# Altium PCB Inverter45attempt.PcbDoc (part 1 of 3)
Units mm, origin at the board's own origin, x right, y up, seen from the top; angles counter-clockwise.
Board outline 150 x 150 mm, 2 copper layers (Top Layer, Bottom Layer), stack 1.74 mm thick; 275 components, 191 nets, 1690 pads, 661 vias.
Unrouted connection lines stored in the file: 411.
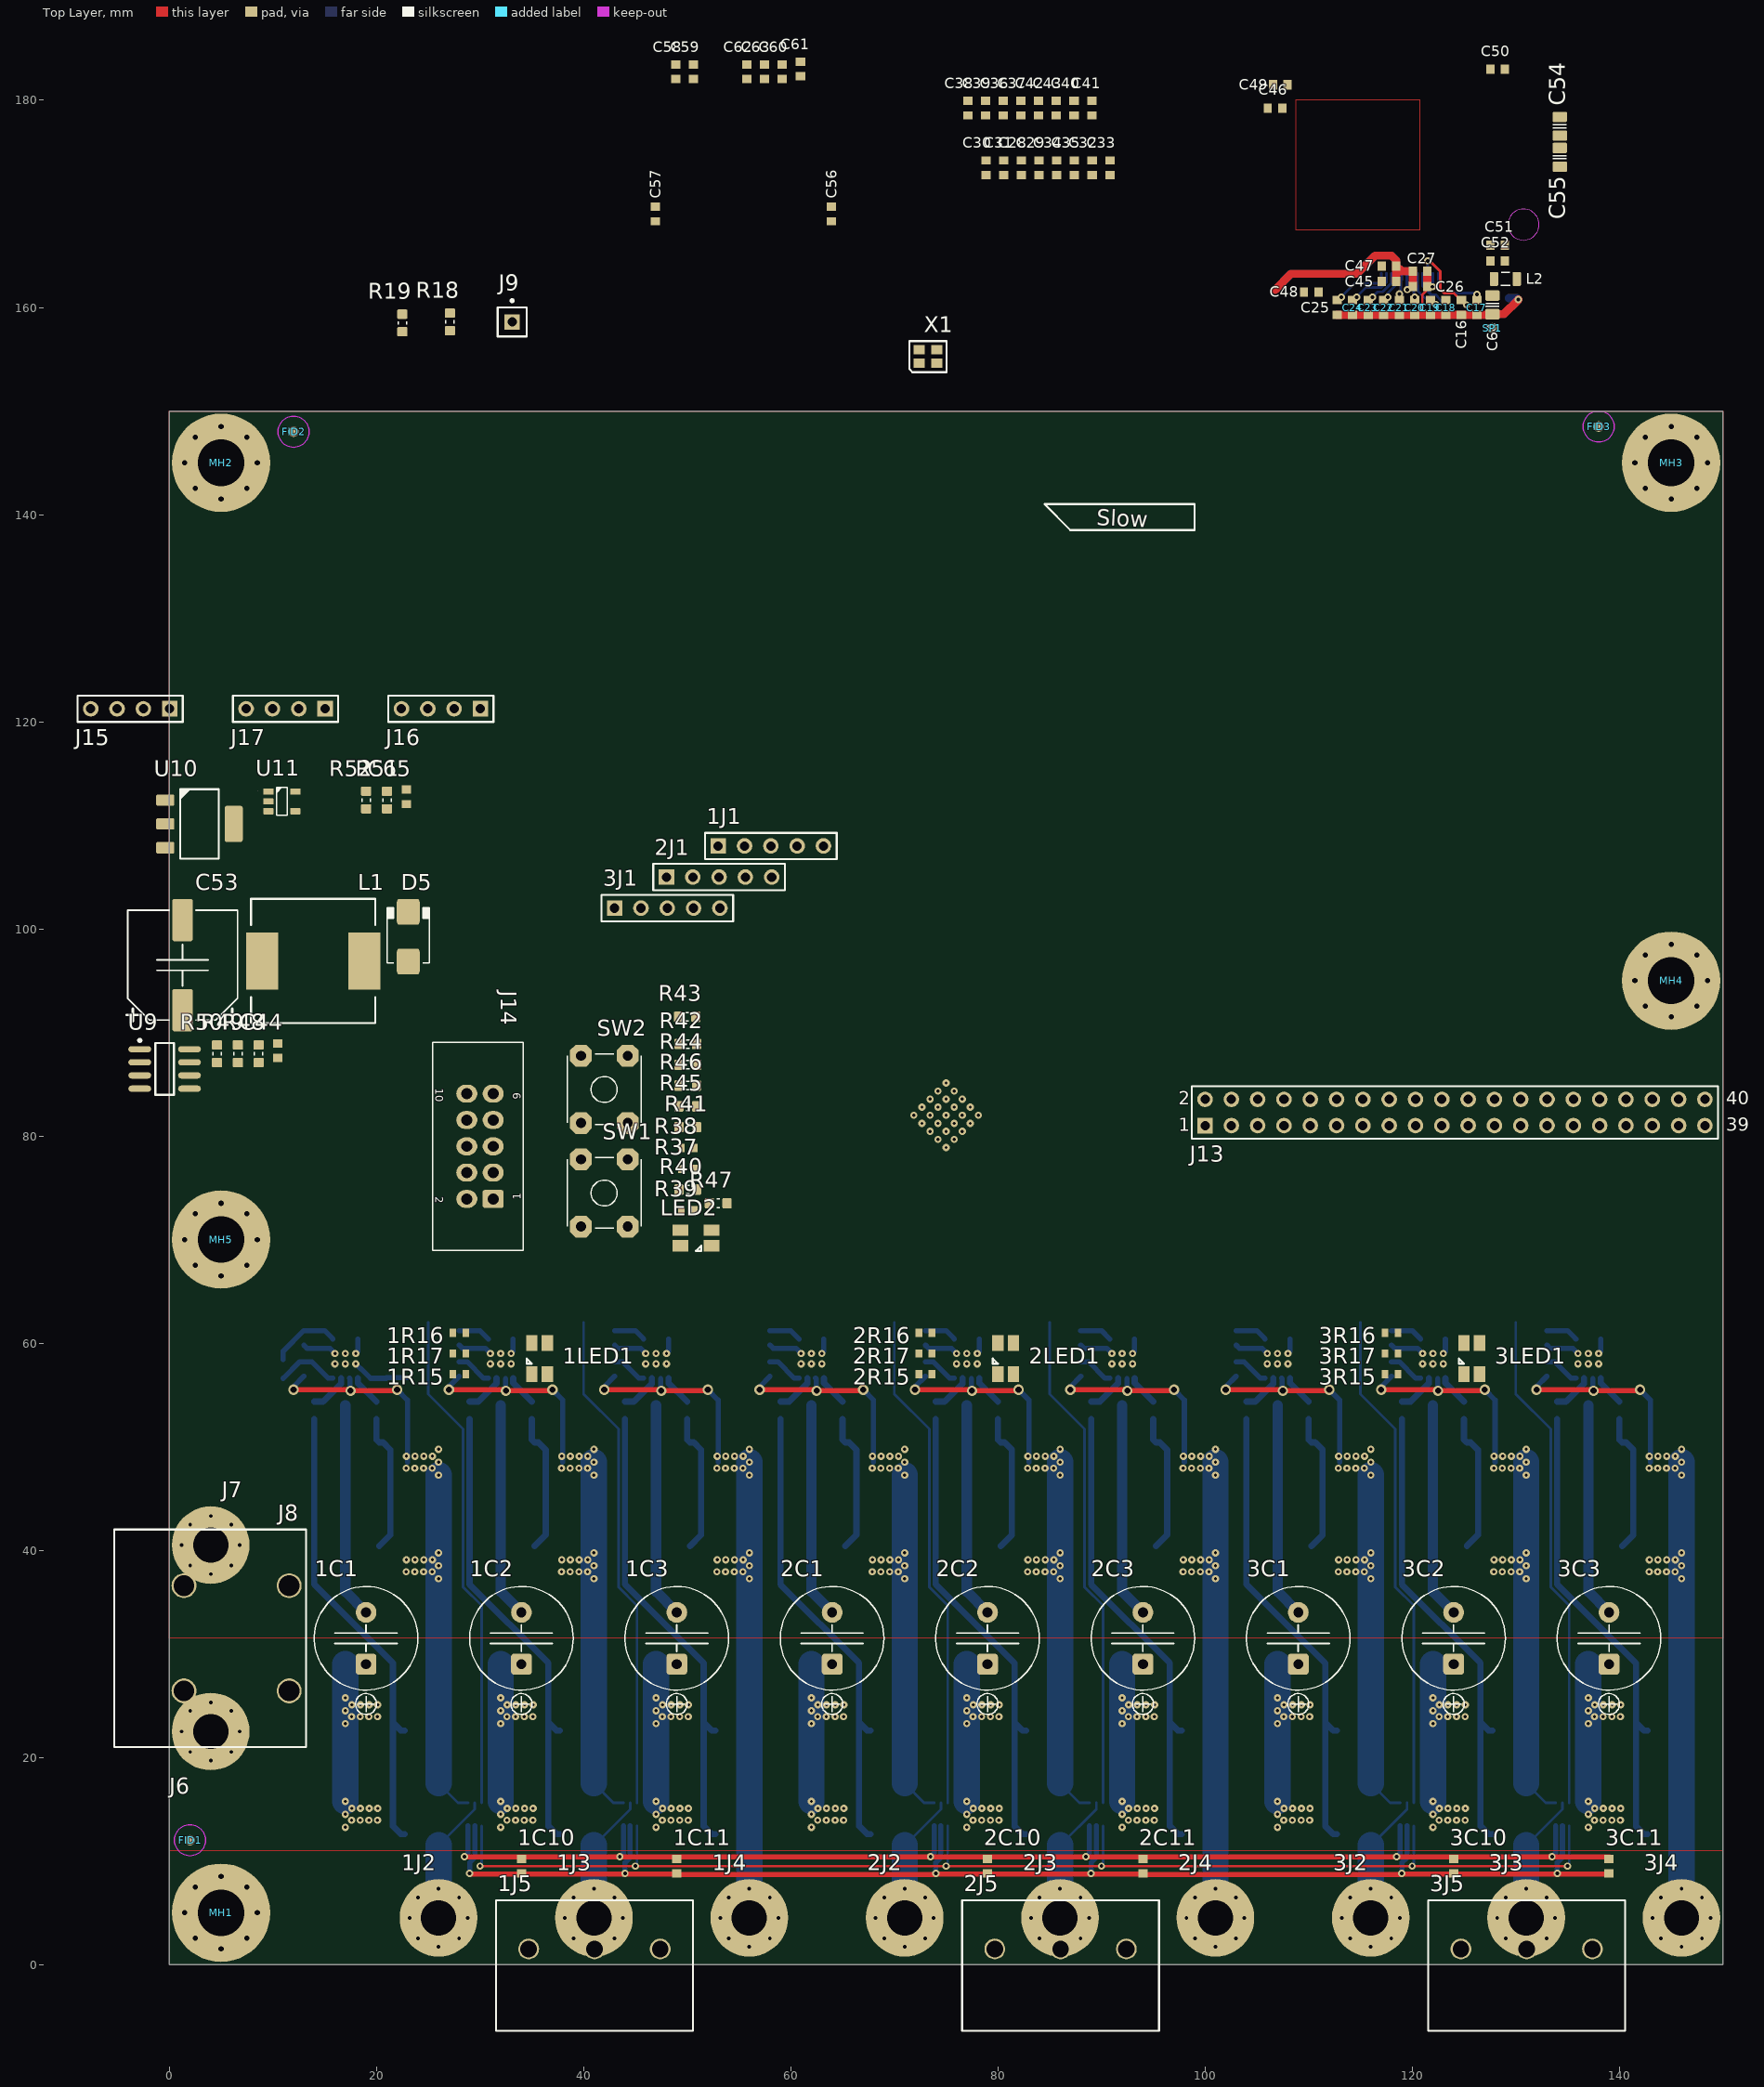
[diagram p0: Top Layer view]
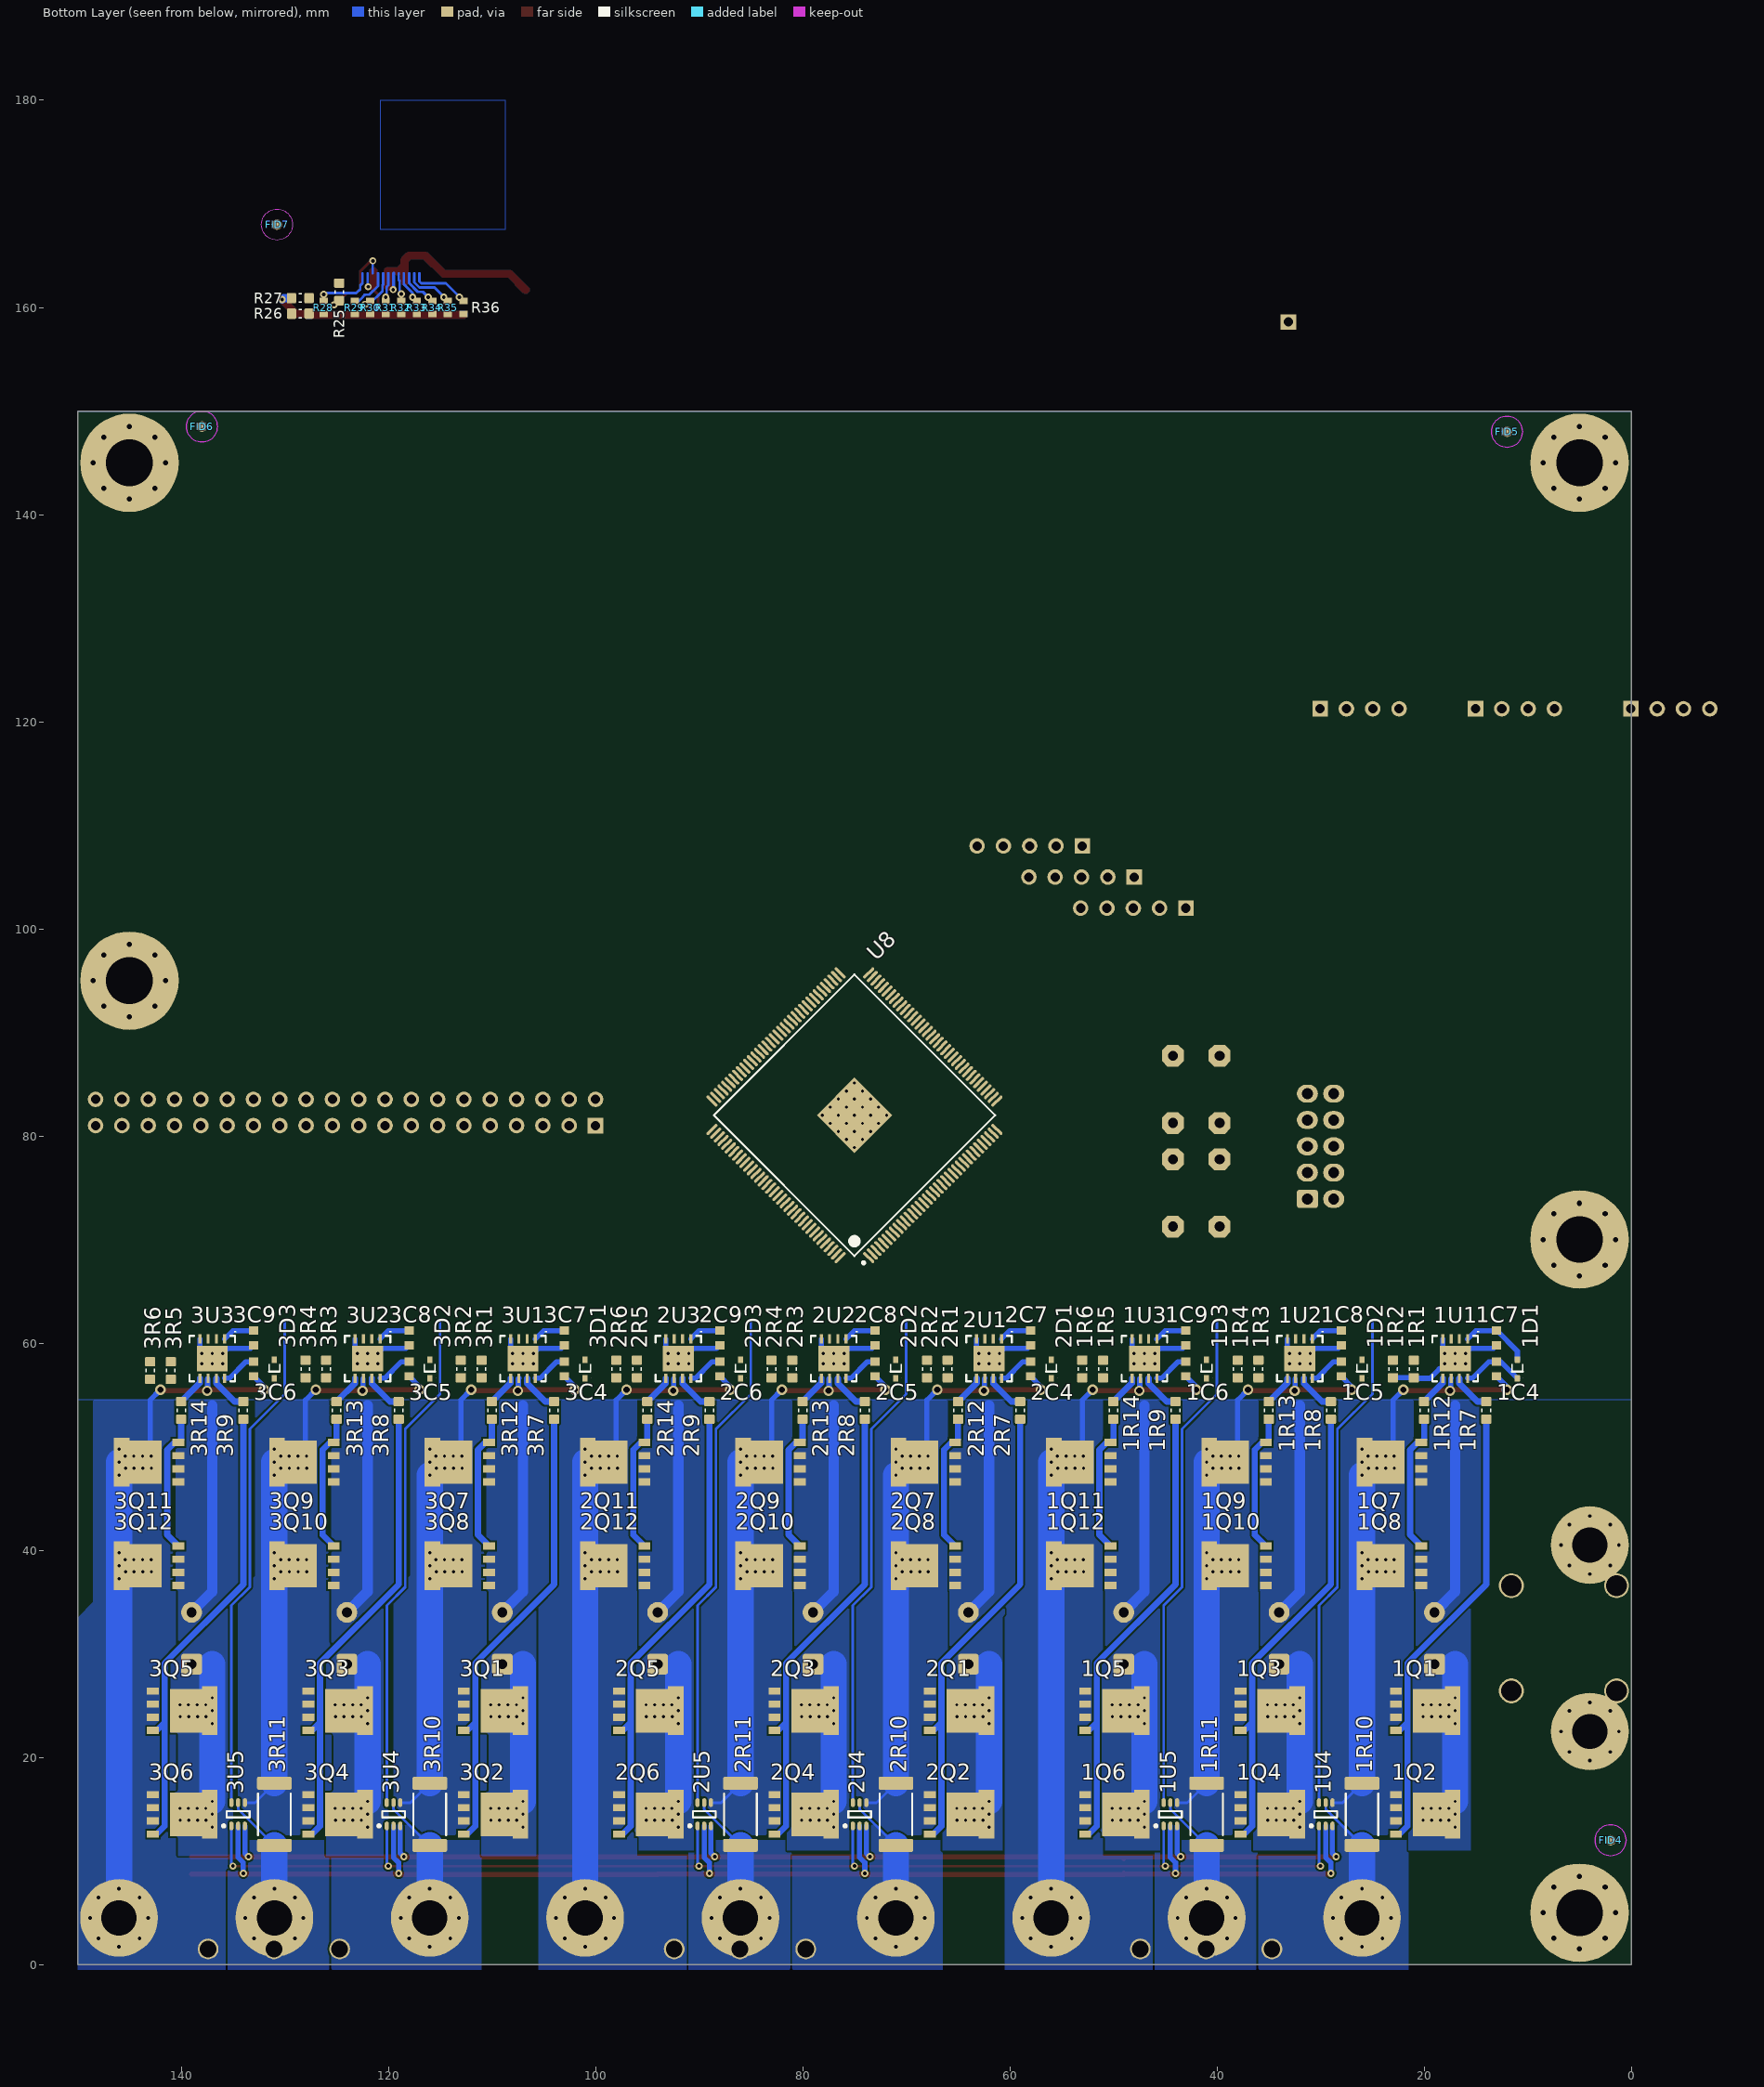
[diagram p1: Bottom Layer view, seen from below]

## Layer stack, top to bottom
Top Solder: solder mask 0.0102, Solder Resist, Dk 3.5
Top Layer: signal copper 0.07
Dielectric 1: dielectric 1.6, FR-4, Dk 4.8
Bottom Layer: signal copper 0.07
Bottom Solder: solder mask 0.0102, Solder Resist, Dk 3.5

## Board outline
0,0 150,0 150,150 0,150

## Design rules (kind name [scope] priority, off if disabled: settings)
AssemblyTestPointUsage SilkToBoardRegionClearance [All] p2:
Clearance HV_Clearance [InNetClass('HV')] p1: gap=0.2
Clearance [All] p2: gap=0.152
ComponentClearance ScrewTerminals [HasFootprint('MC000051') Or HasFootprint('MC000232') vs (HasFootprint('M3 Spade Hole'))] p1: gap=-10 collisioncheckmode=3 verticalgap=2540 showdistances=FALSE
ComponentClearance [All] p2: gap=0.254 collisioncheckmode=3 verticalgap=0.254 showdistances=FALSE
Height [All] p1: minheight=0 maxheight=30 prefheight=12.7
MatchedLengths DiffPair_DIFF100MatchedLengths [InDifferentialPairClass('DIFF100')] p1: tolerance=0.152 checknetsindiffpair=TRUE checkdiffpairvsdiffpair=FALSE checkothers=FALSE
MinimumSolderMaskSliver SilkscreenOverComponentPads_1 [All] p2: minsoldermaskwidth=0.254
MinimumSolderMaskSliver SilkToSolderMaskClearance [IsPad] p3: minsoldermaskwidth=0.254
MinimumSolderMaskSliver SilkscreenOverComponentPads [All] p4: minsoldermaskwidth=0.254
PolygonConnect [All] p1: connectstyle=Direct reliefconductorwidth=0.254 reliefentries=4 polygonreliefangle="90 Angle" airgapwidth=0.254
RoutingVias [All] p1: holewidth=0.35 width=0.7 viastyle="Through Hole" minholewidth=0.3 minwidth=0.6 maxholewidth=1 maxwidth=1.4
SilkToBoardRegionClearance SilkToBoardRegionClearance_1 [All] p1:
SilkToSolderMaskClearance SilkToSolderMaskClearance_1 [IsPad] p1: minsilkscreentomaskgap=0.254 clearancetoexposedcopper=TRUE
SolderMaskExpansion [All] p1: expansion=0.102
UnpouredPolygon [All] p1: allowunpoured=FALSE
Width PWR [InNetClass('PWR')] p1: maxlimit=10 minlimit=0.254 preferedwidth=0.5 minimp=50.000000 maximp=50.000000 favimp=50.000000
Width [All] p2: maxlimit=2.54 minlimit=0.152 preferedwidth=0.254
25 further rules are at their usual default settings.

## Classes and differential pairs
component class M2: 2C1 2C2 2C3 2C4 2C5 2C6 2C7 2C8 2C9 2C10 2C11 2D1 2D2 2D3 2J1 2J2 2J3 2J4 2J5 2LED1 2Q1 2Q2 2Q3 2Q4 2Q5 2Q6 2Q7 2Q8 2Q9 2Q10 2Q11 2Q12 2R1 2R2 2R3 2R4 2R5 2R6 2R7 2R8 2R9 2R10 2R11 2R12 2R13 2R14 2R15 2R16 2R17 2U1 2U2 2U3 2U4 2U5
component class M1: 1C1 1C2 1C3 1C4 1C5 1C6 1C7 1C8 1C9 1C10 1C11 1D1 1D2 1D3 1J1 1J2 1J3 1J4 1J5 1LED1 1Q1 1Q2 1Q3 1Q4 1Q5 1Q6 1Q7 1Q8 1Q9 1Q10 1Q11 1Q12 1R1 1R2 1R3 1R4 1R5 1R6 1R7 1R8 1R9 1R10 1R11 1R12 1R13 1R14 1R15 1R16 1R17 1U1 1U2 1U3 1U4 1U5
net class HV: 1PH_A 1PH_A_Q 1PH_B 1PH_B_Q 1PH_C 2PH_A 2PH_A_Q 2PH_B 2PH_B_Q 2PH_C 3PH_A 3PH_A_Q 3PH_B 3PH_B_Q 3PH_C DCBUS Net1C4_2 Net1C5_2 Net1C6_2 Net1Q1_G Net1Q3_G Net1Q5_G Net1Q7_G Net1Q9_G Net1Q11_G Net1R7_2 Net1R8_2 Net1R9_2 Net1R12_2 Net1R13_2 Net1R14_2 Net2C4_2 Net2C5_2 Net2C6_2 Net2Q1_G Net2Q3_G Net2Q5_G Net2Q7_G Net2Q9_G Net2Q11_G Net2R7_2 Net2R8_2 Net2R9_2 Net2R12_2 Net2R13_2 Net2R14_2 Net3C4_2 Net3C5_2 Net3C6_2 Net3Q1_G Net3Q3_G Net3Q5_G Net3Q7_G Net3Q9_G Net3Q11_G Net3R7_2 Net3R8_2 Net3R9_2 Net3R12_2 Net3R13_2 Net3R14_2
component class M3: 3C1 3C2 3C3 3C4 3C5 3C6 3C7 3C8 3C9 3C10 3C11 3D1 3D2 3D3 3J1 3J2 3J3 3J4 3J5 3LED1 3Q1 3Q2 3Q3 3Q4 3Q5 3Q6 3Q7 3Q8 3Q9 3Q10 3Q11 3Q12 3R1 3R2 3R3 3R4 3R5 3R6 3R7 3R8 3R9 3R10 3R11 3R12 3R13 3R14 3R15 3R16 3R17 3U1 3U2 3U3 3U4 3U5
net class ENC_A[1..3]: ENC_A1 ENC_A2 ENC_A3
net class ENC_B[1..3]: ENC_B1 ENC_B2 ENC_B3
net class ENC_Z[1..3]: ENC_Z1 ENC_Z2 ENC_Z3
net class IA[1..3]: IA1 IA2 IA3
net class IB[1..3]: IB1 IB2 IB3
net class LEDB[1..3]: LEDB1 LEDB2 LEDB3
net class LEDG[1..3]: LEDG1 LEDG2 LEDG3
net class LEDR[1..3]: LEDR1 LEDR2 LEDR3
net class PWM_AH[1..3]: PWM_AH1 PWM_AH2 PWM_AH3
net class PWM_AL[1..3]: PWM_AL1 PWM_AL2 PWM_AL3
net class PWM_BH[1..3]: PWM_BH1 PWM_BH2 PWM_BH3
net class PWM_BL[1..3]: PWM_BL1 PWM_BL2 PWM_BL3
net class PWM_CH[1..3]: PWM_CH1 PWM_CH2 PWM_CH3
net class PWM_CL[1..3]: PWM_CL1 PWM_CL2 PWM_CL3
channel class M0: M1 M2 M3
component class Analouge: C16 C17 C18 C19 C20 C21 C22 C23 C24 C25 R25 R26 R27 R28 R29 R30 R31 R32 R33 R34 R35 R36
component class AUX: J6 J7 J8 J9 R18 R19
component class Config: J14 LED2 R37 R38 R39 R40 R41 R42 R43 R44 R45 R46 R47 SW1 SW2
component class FPGA: FID7 J13 X1
component class Power: C26 C27 C28 C29 C30 C31 C32 C33 C34 C35 C36 C37 C38 C39 C40 C41 C42 C43 C44 C45 C46 C47 C48 C49 C50 C51 C52 C53 C54 C55 C56 C57 C58 C59 C60 C61 C62 C63 C64 C65 D5 J15 J16 J17 L1 L2 R48 R49 R50 R51 R52 SP1 U8 U9 U10 U11
component class Top: FID1 FID2 FID3 FID4 FID5 FID6 MH1 MH2 MH3 MH4 MH5
net class PWR: 5V 12V AGND AVCC GND VCC

## Components (designator, comment, footprint, x,y, rotation, side; value= is the part's Value field where it differs from the comment)
1C1 "35ZLH680MEFC10X23" CAPE10.0MM_Rad_10x14mm 19,31.5 r90 top (schematic designator C1)
1C2 "35ZLH680MEFC10X23" CAPE10.0MM_Rad_10x14mm 34,31.5 r90 top (schematic designator C2)
1C3 "35ZLH680MEFC10X23" CAPE10.0MM_Rad_10x14mm 49,31.5 r90 top (schematic designator C3)
1C4 "MC0603X105K160" 1608[0603] 13,57.5 r90 bottom (schematic designator C4)
1C5 "MC0603X105K160" 1608[0603] 28,57.5 r90 bottom (schematic designator C5)
1C6 "MC0603X105K160" 1608[0603] 43,57.5 r90 bottom (schematic designator C6)
1C7 "MC0603X105K160" 1608[0603] 13,60.5 r90 bottom (schematic designator C7)
1C8 "MC0603X105K160" 1608[0603] 28,60.5 r90 bottom (schematic designator C8)
1C9 "MC0603X105K160" 1608[0603] 43,60.5 r90 bottom (schematic designator C9)
1C10 "MC0603B104K160CT" 1608[0603] 34,9.5 r90 top (schematic designator C10)
1C11 "MC0603B104K160CT" 1608[0603] 49,9.5 r90 top (schematic designator C11)
1D1 "RB521S30T1G" SOD523F 11,57.5 r90 bottom (schematic designator D1)
1D2 "RB521S30T1G" SOD523F 26,57.5 r90 bottom (schematic designator D2)
1D3 "RB521S30T1G" SOD523F 41,57.5 r90 bottom (schematic designator D3)
1J1 "Header 5" HDR1X5 53,108 r0 top (schematic designator J1)
1J2 "M3" "M3 Spade Hole" 26,4.5 r0 top (schematic designator J2)
1J3 "M3" "M3 Spade Hole" 41,4.5 r0 top (schematic designator J3)
1J4 "M3" "M3 Spade Hole" 56,4.5 r0 top (schematic designator J4)
1J5 "MC000051" MC000051 34.7,1.5 r0 top (schematic designator J5)
1LED1 "RGB" ASMB-MTB1 35,60 r0 top (schematic designator LED1)
1Q1 "NTMFS4937NT1G" SO8FL 20,24.5 r270 bottom (schematic designator Q1)
1Q2 "NTMFS4937NT1G" SO8FL 20,14.5 r270 bottom (schematic designator Q2)
1Q3 "NTMFS4937NT1G" SO8FL 35,24.5 r270 bottom (schematic designator Q3)
1Q4 "NTMFS4937NT1G" SO8FL 35,14.5 r270 bottom (schematic designator Q4)
1Q5 "NTMFS4937NT1G" SO8FL 50,24.5 r270 bottom (schematic designator Q5)
1Q6 "NTMFS4937NT1G" SO8FL 50,14.5 r270 bottom (schematic designator Q6)
1Q7 "NTMFS4937NT1G" SO8FL 23,48.5 r90 bottom (schematic designator Q7)
1Q8 "NTMFS4937NT1G" SO8FL 23,38.5 r90 bottom (schematic designator Q8)
1Q9 "NTMFS4937NT1G" SO8FL 38,48.5 r90 bottom (schematic designator Q9)
1Q10 "NTMFS4937NT1G" SO8FL 38,38.5 r90 bottom (schematic designator Q10)
1Q11 "NTMFS4937NT1G" SO8FL 53,48.5 r90 bottom (schematic designator Q11)
1Q12 "NTMFS4937NT1G" SO8FL 53,38.5 r90 bottom (schematic designator Q12)
1R1 "MCMR06X3001FTL" RESC1608X55N#1 21,57.5 r90 bottom (schematic designator R1)
1R2 "MCMR06X3001FTL" RESC1608X55N#1 23,57.5 r90 bottom (schematic designator R2)
1R3 "MCMR06X3001FTL" RESC1608X55N#1 36,57.5 r90 bottom (schematic designator R3)
1R4 "MCMR06X3001FTL" RESC1608X55N#1 38,57.5 r90 bottom (schematic designator R4)
1R5 "MCMR06X3001FTL" RESC1608X55N#1 51,57.5 r90 bottom (schematic designator R5)
1R6 "MCMR06X3001FTL" RESC1608X55N#1 53,57.5 r90 bottom (schematic designator R6)
1R7 "MCWR06W1R00FTL" RESC1608X55N#2 14,53.5 r270 bottom (schematic designator R7)
1R8 "MCWR06W1R00FTL" RESC1608X55N#1 29,53.5 r90 bottom (schematic designator R8)
1R9 "MCWR06W1R00FTL" RESC1608X55N#1 44,53.5 r90 bottom (schematic designator R9)
1R10 "TLR3A20DR0005FTDG" RESC6332X70N 26,14.5 r90 bottom (schematic designator R10)
1R11 "TLR3A20DR0005FTDG" RESC6332X70N 41,14.5 r90 bottom (schematic designator R11)
1R12 "MCWR06W1R00FTL" RESC1608X55N#1 20,53.5 r90 bottom (schematic designator R12)
1R13 "MCWR06W1R00FTL" RESC1608X55N#1 35,53.5 r90 bottom (schematic designator R13)
1R14 "MCWR06W1R00FTL" RESC1608X55N#1 50,53.5 r90 bottom (schematic designator R14)
1R15 "MCWR06X3300FTL" RESC1608X06L#1 28,57 r180 top (schematic designator R15)
1R16 "MCWR06X3300FTL" RESC1608X06L#1 28,61 r180 top (schematic designator R16)
1R17 "MCWR06X3300FTL" RESC1608X06L#1 28,59 r180 top (schematic designator R17)
1U1 "LM5109BSD/NOPB" SON80P400X80_HS-9N 17,58.5 r270 bottom (schematic designator U1)
1U2 "LM5109BSD/NOPB" SON80P400X80_HS-9N 32,58.5 r270 bottom (schematic designator U2)
1U3 "LM5109BSD/NOPB" SON80P400X80_HS-9N 47,58.5 r270 bottom (schematic designator U3)
1U4 "INA199A1DCKR" TSOP65P210X110-6N 29.5,14.5 r90 bottom (schematic designator U4)
1U5 "INA199A1DCKR" TSOP65P210X110-6N 44.5,14.5 r90 bottom (schematic designator U5)
2C1 "35ZLH680MEFC10X23" CAPE10.0MM_Rad_10x14mm 64,31.5 r90 top (schematic designator C1)
2C2 "35ZLH680MEFC10X23" CAPE10.0MM_Rad_10x14mm 79,31.5 r90 top (schematic designator C2)
2C3 "35ZLH680MEFC10X23" CAPE10.0MM_Rad_10x14mm 94,31.5 r90 top (schematic designator C3)
2C4 "MC0603X105K160" 1608[0603] 58,57.5 r90 bottom (schematic designator C4)
2C5 "MC0603X105K160" 1608[0603] 73,57.5 r90 bottom (schematic designator C5)
2C6 "MC0603X105K160" 1608[0603] 88,57.5 r90 bottom (schematic designator C6)
2C7 "MC0603X105K160" 1608[0603] 58,60.5 r90 bottom (schematic designator C7)
2C8 "MC0603X105K160" 1608[0603] 73,60.5 r90 bottom (schematic designator C8)
2C9 "MC0603X105K160" 1608[0603] 88,60.5 r90 bottom (schematic designator C9)
2C10 "MC0603B104K160CT" 1608[0603] 79,9.5 r90 top (schematic designator C10)
2C11 "MC0603B104K160CT" 1608[0603] 94,9.5 r90 top (schematic designator C11)
2D1 "RB521S30T1G" SOD523F 56,57.5 r90 bottom (schematic designator D1)
2D2 "RB521S30T1G" SOD523F 71,57.5 r90 bottom (schematic designator D2)
2D3 "RB521S30T1G" SOD523F 86,57.5 r90 bottom (schematic designator D3)
2J1 "Header 5" HDR1X5 48,105 r0 top (schematic designator J1)
2J2 "M3" "M3 Spade Hole" 71,4.5 r0 top (schematic designator J2)
2J3 "M3" "M3 Spade Hole" 86,4.5 r0 top (schematic designator J3)
2J4 "M3" "M3 Spade Hole" 101,4.5 r0 top (schematic designator J4)
2J5 "MC000051" MC000051 79.7,1.5 r0 top (schematic designator J5)
2LED1 "RGB" ASMB-MTB1 80,60 r0 top (schematic designator LED1)
2Q1 "NTMFS4937NT1G" SO8FL 65,24.5 r270 bottom (schematic designator Q1)
2Q2 "NTMFS4937NT1G" SO8FL 65,14.5 r270 bottom (schematic designator Q2)
2Q3 "NTMFS4937NT1G" SO8FL 80,24.5 r270 bottom (schematic designator Q3)
2Q4 "NTMFS4937NT1G" SO8FL 80,14.5 r270 bottom (schematic designator Q4)
2Q5 "NTMFS4937NT1G" SO8FL 95,24.5 r270 bottom (schematic designator Q5)
2Q6 "NTMFS4937NT1G" SO8FL 95,14.5 r270 bottom (schematic designator Q6)
2Q7 "NTMFS4937NT1G" SO8FL 68,48.5 r90 bottom (schematic designator Q7)
2Q8 "NTMFS4937NT1G" SO8FL 68,38.5 r90 bottom (schematic designator Q8)
2Q9 "NTMFS4937NT1G" SO8FL 83,48.5 r90 bottom (schematic designator Q9)
2Q10 "NTMFS4937NT1G" SO8FL 83,38.5 r90 bottom (schematic designator Q10)
2Q11 "NTMFS4937NT1G" SO8FL 98,48.5 r90 bottom (schematic designator Q11)
2Q12 "NTMFS4937NT1G" SO8FL 98,38.5 r90 bottom (schematic designator Q12)
2R1 "MCMR06X3001FTL" RESC1608X55N#1 66,57.5 r90 bottom (schematic designator R1)
2R2 "MCMR06X3001FTL" RESC1608X55N#1 68,57.5 r90 bottom (schematic designator R2)
2R3 "MCMR06X3001FTL" RESC1608X55N#1 81,57.5 r90 bottom (schematic designator R3)
2R4 "MCMR06X3001FTL" RESC1608X55N#1 83,57.5 r90 bottom (schematic designator R4)
2R5 "MCMR06X3001FTL" RESC1608X55N#1 96,57.5 r90 bottom (schematic designator R5)
2R6 "MCMR06X3001FTL" RESC1608X55N#1 98,57.5 r90 bottom (schematic designator R6)
2R7 "MCWR06W1R00FTL" RESC1608X55N#2 59,53.5 r270 bottom (schematic designator R7)
2R8 "MCWR06W1R00FTL" RESC1608X55N#1 74,53.5 r90 bottom (schematic designator R8)
2R9 "MCWR06W1R00FTL" RESC1608X55N#1 89,53.5 r90 bottom (schematic designator R9)
2R10 "TLR3A20DR0005FTDG" RESC6332X70N 71,14.5 r90 bottom (schematic designator R10)
2R11 "TLR3A20DR0005FTDG" RESC6332X70N 86,14.5 r90 bottom (schematic designator R11)
2R12 "MCWR06W1R00FTL" RESC1608X55N#1 65,53.5 r90 bottom (schematic designator R12)
2R13 "MCWR06W1R00FTL" RESC1608X55N#1 80,53.5 r90 bottom (schematic designator R13)
2R14 "MCWR06W1R00FTL" RESC1608X55N#1 95,53.5 r90 bottom (schematic designator R14)
2R15 "MCWR06X3300FTL" RESC1608X06L#1 73,57 r180 top (schematic designator R15)
2R16 "MCWR06X3300FTL" RESC1608X06L#1 73,61 r180 top (schematic designator R16)
2R17 "MCWR06X3300FTL" RESC1608X06L#1 73,59 r180 top (schematic designator R17)
2U1 "LM5109BSD/NOPB" SON80P400X80_HS-9N 62,58.5 r270 bottom (schematic designator U1)
2U2 "LM5109BSD/NOPB" SON80P400X80_HS-9N 77,58.5 r270 bottom (schematic designator U2)
2U3 "LM5109BSD/NOPB" SON80P400X80_HS-9N 92,58.5 r270 bottom (schematic designator U3)
2U4 "INA199A1DCKR" TSOP65P210X110-6N 74.5,14.5 r90 bottom (schematic designator U4)
2U5 "INA199A1DCKR" TSOP65P210X110-6N 89.5,14.5 r90 bottom (schematic designator U5)
3C1 "35ZLH680MEFC10X23" CAPE10.0MM_Rad_10x14mm 109,31.5 r90 top (schematic designator C1)
3C2 "35ZLH680MEFC10X23" CAPE10.0MM_Rad_10x14mm 124,31.5 r90 top (schematic designator C2)
3C3 "35ZLH680MEFC10X23" CAPE10.0MM_Rad_10x14mm 139,31.5 r90 top (schematic designator C3)
3C4 "MC0603X105K160" 1608[0603] 103,57.5 r90 bottom (schematic designator C4)
3C5 "MC0603X105K160" 1608[0603] 118,57.5 r90 bottom (schematic designator C5)
3C6 "MC0603X105K160" 1608[0603] 133,57.5 r90 bottom (schematic designator C6)
3C7 "MC0603X105K160" 1608[0603] 103,60.5 r90 bottom (schematic designator C7)
3C8 "MC0603X105K160" 1608[0603] 118,60.5 r90 bottom (schematic designator C8)
3C9 "MC0603X105K160" 1608[0603] 133,60.5 r90 bottom (schematic designator C9)
3C10 "MC0603B104K160CT" 1608[0603] 124,9.5 r90 top (schematic designator C10)
3C11 "MC0603B104K160CT" 1608[0603] 139,9.5 r90 top (schematic designator C11)
3D1 "RB521S30T1G" SOD523F 101,57.5 r90 bottom (schematic designator D1)
3D2 "RB521S30T1G" SOD523F 116,57.5 r90 bottom (schematic designator D2)
3D3 "RB521S30T1G" SOD523F 131,57.5 r90 bottom (schematic designator D3)
3J1 "Header 5" HDR1X5 43,102 r0 top (schematic designator J1)
3J2 "M3" "M3 Spade Hole" 116,4.5 r0 top (schematic designator J2)
3J3 "M3" "M3 Spade Hole" 131,4.5 r0 top (schematic designator J3)
3J4 "M3" "M3 Spade Hole" 146,4.5 r0 top (schematic designator J4)
3J5 "MC000051" MC000051 124.7,1.5 r0 top (schematic designator J5)
3LED1 "RGB" ASMB-MTB1 125,60 r0 top (schematic designator LED1)
3Q1 "NTMFS4937NT1G" SO8FL 110,24.5 r270 bottom (schematic designator Q1)
3Q2 "NTMFS4937NT1G" SO8FL 110,14.5 r270 bottom (schematic designator Q2)
3Q3 "NTMFS4937NT1G" SO8FL 125,24.5 r270 bottom (schematic designator Q3)
3Q4 "NTMFS4937NT1G" SO8FL 125,14.5 r270 bottom (schematic designator Q4)
3Q5 "NTMFS4937NT1G" SO8FL 140,24.5 r270 bottom (schematic designator Q5)
3Q6 "NTMFS4937NT1G" SO8FL 140,14.5 r270 bottom (schematic designator Q6)
3Q7 "NTMFS4937NT1G" SO8FL 113,48.5 r90 bottom (schematic designator Q7)
3Q8 "NTMFS4937NT1G" SO8FL 113,38.5 r90 bottom (schematic designator Q8)
3Q9 "NTMFS4937NT1G" SO8FL 128,48.5 r90 bottom (schematic designator Q9)
3Q10 "NTMFS4937NT1G" SO8FL 128,38.5 r90 bottom (schematic designator Q10)
3Q11 "NTMFS4937NT1G" SO8FL 143,48.5 r90 bottom (schematic designator Q11)
3Q12 "NTMFS4937NT1G" SO8FL 143,38.5 r90 bottom (schematic designator Q12)
3R1 "MCMR06X3001FTL" RESC1608X55N#1 111,57.5 r90 bottom (schematic designator R1)
3R2 "MCMR06X3001FTL" RESC1608X55N#1 113,57.5 r90 bottom (schematic designator R2)
3R3 "MCMR06X3001FTL" RESC1608X55N#1 126,57.5 r90 bottom (schematic designator R3)
3R4 "MCMR06X3001FTL" RESC1608X55N#1 128,57.5 r90 bottom (schematic designator R4)
3R5 "MCMR06X3001FTL" RESC1608X55N#1 141,57.35 r90 bottom (schematic designator R5)
3R6 "MCMR06X3001FTL" RESC1608X55N#1 143,57.35 r90 bottom (schematic designator R6)
3R7 "MCWR06W1R00FTL" RESC1608X55N#2 104,53.5 r270 bottom (schematic designator R7)
3R8 "MCWR06W1R00FTL" RESC1608X55N#1 119,53.5 r90 bottom (schematic designator R8)
3R9 "MCWR06W1R00FTL" RESC1608X55N#1 134,53.5 r90 bottom (schematic designator R9)
3R10 "TLR3A20DR0005FTDG" RESC6332X70N 116,14.5 r90 bottom (schematic designator R10)
3R11 "TLR3A20DR0005FTDG" RESC6332X70N 131,14.5 r90 bottom (schematic designator R11)
3R12 "MCWR06W1R00FTL" RESC1608X55N#1 110,53.5 r90 bottom (schematic designator R12)
3R13 "MCWR06W1R00FTL" RESC1608X55N#1 125,53.5 r90 bottom (schematic designator R13)
3R14 "MCWR06W1R00FTL" RESC1608X55N#1 140,53.5 r90 bottom (schematic designator R14)
3R15 "MCWR06X3300FTL" RESC1608X06L#1 118,57 r180 top (schematic designator R15)
3R16 "MCWR06X3300FTL" RESC1608X06L#1 118,61 r180 top (schematic designator R16)
3R17 "MCWR06X3300FTL" RESC1608X06L#1 118,59 r180 top (schematic designator R17)
3U1 "LM5109BSD/NOPB" SON80P400X80_HS-9N 107,58.5 r270 bottom (schematic designator U1)
3U2 "LM5109BSD/NOPB" SON80P400X80_HS-9N 122,58.5 r270 bottom (schematic designator U2)
3U3 "LM5109BSD/NOPB" SON80P400X80_HS-9N 137,58.5 r270 bottom (schematic designator U3)
3U4 "INA199A1DCKR" TSOP65P210X110-6N 119.5,14.5 r90 bottom (schematic designator U4)
3U5 "INA199A1DCKR" TSOP65P210X110-6N 134.5,14.5 r90 bottom (schematic designator U5)
C16 "MC0603X105K160" 1608[0603] 124.75,160 r90 top
C17 "MC0603N221J500CT" 1608[0603] 126.25,160 r90 top
C18 "MC0603N221J500CT" 1608[0603] 123.25,160 r90 top
C19 "MC0603N221J500CT" 1608[0603] 121.75,160 r90 top
C20 "MC0603N221J500CT" 1608[0603] 120.25,160 r90 top
C21 "MC0603N221J500CT" 1608[0603] 118.75,160 r90 top
C22 "MC0603N221J500CT" 1608[0603] 117.25,160 r90 top
C23 "MC0603N221J500CT" 1608[0603] 115.75,160 r90 top
C24 "MC0603N221J500CT" 1608[0603] 114.25,160 r90 top
C25 "MC0603N221J500CT" 1608[0603] 112.75,160 r90 top
C26 "MC0603X105K160" 1608[0603] 120.75,162 r180 top
C27 "MC0603B104K160CT" 1608[0603] 120.75,163.5 r180 top
C28 "MC0603B104K160CT" 1608[0603] 82.27,173.492 r90 top
C29 "MC0603B104K160CT" 1608[0603] 83.978,173.492 r90 top
C30 "MC0603B104K160CT" 1608[0603] 78.854,173.492 r90 top
C31 "MC0603B104K160CT" 1608[0603] 80.562,173.492 r90 top
C32 "MC0603B104K160CT" 1608[0603] 89.102,173.492 r90 top
C33 "MC0603B104K160CT" 1608[0603] 90.81,173.492 r90 top
C34 "MC0603B104K160CT" 1608[0603] 85.686,173.492 r90 top
C35 "MC0603B104K160CT" 1608[0603] 87.394,173.492 r90 top
C36 "MC0603X105K160" 1608[0603] 80.52,179.242 r90 top
C37 "MC0603X105K160" 1608[0603] 82.228,179.242 r90 top
C38 "MC0603X105K160" 1608[0603] 77.104,179.242 r90 top
C39 "MC0603X105K160" 1608[0603] 78.812,179.242 r90 top
C40 "MC0603X105K160" 1608[0603] 87.352,179.242 r90 top
C41 "MC0603X105K160" 1608[0603] 89.06,179.242 r90 top
C42 "MC0603X105K160" 1608[0603] 83.936,179.242 r90 top
C43 "MC0603X105K160" 1608[0603] 85.644,179.242 r90 top
C44 "MC0603B471K500CT" 1608[0603] 10.486,88.231 r90 top
C45 "MC0603X105K160" 1608[0603] 117.75,162.5 r0 top
C46 "MC0603X105K160" 1608[0603] 106.75,179.25 r0 top
C47 "MC0603B104K160CT" 1608[0603] 117.75,164 r0 top
C48 "MC0603B104K160CT" 1608[0603] 110.25,161.5 r0 top
C49 "MC0603B104K160CT" 1608[0603] 107.25,181.5 r0 top
C50 "MC0603B104K160CT" 1608[0603] 128.25,183 r180 top
C51 "MC0603B104K160CT" 1608[0603] 128.25,166 r180 top
C52 "MC0603B104K160CT" 1608[0603] 128.25,164.5 r180 top
C53 "EEE1CA471P" CAP_ELEC_SIZE_G 1.281,96.49 r0 top
C54 "MC0805F106Z100CT" CAPC2012X135N 134.25,177.5 r90 top
C55 "MC0805F106Z100CT" CAPC2012X135N 134.25,174.5 r270 top
C56 "MC0603B104K160CT" 1608[0603] 63.94,169.016 r270 top
C57 "MC0603B104K160CT" 1608[0603] 46.94,169.016 r270 top
C58 "MC0603B104K160CT" 1608[0603] 48.918,182.75 r90 top
C59 "MC0603B104K160CT" 1608[0603] 50.626,182.75 r90 top
C60 "MC0603B104K160CT" 1608[0603] 59.166,182.75 r90 top
C61 "MC0603B104K160CT" 1608[0603] 60.94,183.016 r90 top
C62 "MC0603B104K160CT" 1608[0603] 55.75,182.75 r90 top
C63 "MC0603B104K160CT" 1608[0603] 57.458,182.75 r90 top
C64 "MC0805F106Z100CT" CAPC2012X135N 127.75,160.25 r90 top
C65 "MC0603X105K160" 1608[0603] 22.874,112.742 r90 top
D5 "SS13B" DO-214AA 23.073,99.24 r90 top
FID1 "FIDUCIAL" FIDUCIAL 2,12 r0 top
FID2 "FIDUCIAL" FIDUCIAL 12,148 r90 top
FID3 "FIDUCIAL" FIDUCIAL 138,148.5 r90 top
FID4 "FIDUCIAL" FIDUCIAL 2,12 r90 bottom
FID5 "FIDUCIAL" FIDUCIAL 12,148 r90 bottom
FID6 "FIDUCIAL" FIDUCIAL 138,148.5 r90 bottom
FID7 "FIDUCIAL" FIDUCIAL 130.75,168 r90 bottom
J6 "M3" "M3 Spade Hole" 4,22.5 r0 top
J7 "M3" "M3 Spade Hole" 4,40.5 r0 top
J8 "MC000232" MC000232 6.5,31.5 r90 top
J9 "Socket" PIN1 33.1,158.6 r0 top
J13 "Header 20X2" HDR2X20 100,81 r0 top
J14 "shrouded box header" 10P_PCB_HEADER_BRD_MNT 30,79 r180 top
J15 "Header 4" HDR1X4 0.04,121.25 r180 top
J16 "Header 4" HDR1X4 30.04,121.25 r180 top
J17 "Header 4" HDR1X4 15.04,121.25 r180 top
L1 "MCSDRH125B-221MHF" "Inductor 12x12mm" 13.893,96.892 r0 top
L2 "2508056017Y2" FBC2012N 129,162.75 r0 top
LED2 "RGB" ASMB-MTB1 49.36,69.406 r90 top
MH1 "M4" MH_M4 5,5 r0 top
MH2 "M4" MH_M4 5,145 r0 top
MH3 "M4" MH_M4 145,145 r0 top
MH4 "M4" MH_M4 145,95 r0 top
MH5 "M4" MH_M4 5,70 r0 top
R18 "MCMR06X1002FTL" RESC1608X55N#1 27.1,158.6 r90 top
R19 "MCMR06X1001FTL" RESC1608X55N#1 22.5,158.5 r90 top
R25 "MCWR06W1R00FTL" RESC1608X55N#1 124.75,161.5 r90 bottom
R26 "MCMR06X1002FTL" RESC1608X55N#1 128.5,159.4 r0 bottom
R27 "MCMR06X1001FTL" RESC1608X55N#1 128.5,160.9 r180 bottom
R28 "MCWR06X3300FTL" RESC1608X06L#2 126.25,160 r270 bottom
R29 "MCWR06X3300FTL" RESC1608X06L#2 123.25,160 r270 bottom
R30 "MCWR06X3300FTL" RESC1608X06L#2 121.75,160 r270 bottom
R31 "MCWR06X3300FTL" RESC1608X06L#2 120.25,160 r270 bottom
R32 "MCWR06X3300FTL" RESC1608X06L#2 118.75,160 r270 bottom
R33 "MCWR06X3300FTL" RESC1608X06L#2 117.25,160 r270 bottom
R34 "MCWR06X3300FTL" RESC1608X06L#2 115.75,160 r270 bottom
R35 "MCWR06X3300FTL" RESC1608X06L#2 114.25,160 r270 bottom
R36 "MCWR06X3300FTL" RESC1608X06L#2 112.75,160 r270 bottom
R37 "MCWR06X3300FTL" RESC1608X06L#2 50.058,76.831 r180 top
R38 "MCWR06X3300FTL" RESC1608X06L#2 50.058,78.839 r180 top
R39 "MCWR06X3300FTL" RESC1608X06L#2 50.058,72.815 r180 top
R40 "MCMR06X1002FTL" RESC1608X55N#1 50.058,74.823 r180 top
R41 "MCMR06X1002FTL" RESC1608X55N#1 50.058,80.847 r180 top
R42 "MCMR06X1002FTL" RESC1608X55N#1 50.058,88.879 r180 top
R43 "MCMR06X1001FTL" RESC1608X55N#1 50,91.5 r180 top
R44 "MCMR06X1001FTL" RESC1608X55N#1 50.058,86.871 r180 top
R45 "MCMR06X1002FTL" RESC1608X55N#1 50.058,82.855 r180 top
R46 "MCMR06X1002FTL" RESC1608X55N#1 50.058,84.863 r180 top
R47 "MCMR06X1001FTL" RESC1608X55N#1 53,73.5 r180 top
R48 "ERJ3RQFR33V" RESC1608X55N#1 8.628,87.931 r90 top
R49 "MCMR06X3001FTL" RESC1608X55N#1 6.62,87.931 r90 top
R50 "MCMR06X1001FTL" RESC1608X55N#1 4.612,87.931 r90 top
R51 "MCMR06X1002FTL" RESC1608X55N#1 21.016,112.442 r90 top
R52 "MCMR06X1002FTL" RESC1608X55N#1 19.008,112.442 r90 top
SP1 "Star Point" StarpointWide 127.75,158 r0 top net-tie
SW1 "FSM4JH" FSM4JH 42,74.5 r90 top
SW2 "FSM4JH" FSM4JH 42,84.5 r90 top
U8 "10M08SAE144" SQFP50P2200X2200X165_HS-145N 75,82 r45 bottom
U9 "MC33063AQDRQ1" SO8_N -0.446,86.476 r0 top
U10 "AP1117E33G-13" SOT223 2.918,110.129 r0 top
U11 "LM3490IM5-12/NOPB" SOT23-5 10.864,112.303 r0 top
X1 "X1G0041710047" "SPXO SG-210STF" 73.25,155.25 r0 top

## Footprints (in the part's own frame and the unit in brackets; to place one, negate y for a bottom-side part, rotate by r counter-clockwise, add the part's x,y. Pads: shape width x height; smd on the part's side, far side on the other; paste and mask are expansions set on the pad)
10P_PCB_HEADER_BRD_MNT [mil] "HEADER BRD MNT 10POS 2.54MM"
  round 40 on Mech15: 0(0,0)
  rrect25% 80x68 hole 42: 1(-50,200)
  oval 80x68 hole 42: 2(50,200) 3(-50,100) 4(50,100) 5(-50,0) 6(50,0) 7(-50,-100) 8(50,-100) 9(-50,-200) 10(50,-200)
  silkscreen extent -165,-395 180,395, body extent -162,-394 178,394, height 390
1608[0603] [mm] "Chip Capacitor, Body 1.6x0.8mm, IPC High Density"
  rect 0.8x0.9 smd: 1(-0.7,0) 2(0.7,0)
  body extent -0.87,-0.48 0.87,0.48, height 1.3
ASMB-MTB1 [mm]
  rect 1.1x1.5 smd: 1(0,-3) 2(0,0) 3(1.5,0) 4(1.5,-3)
  silkscreen extent -0.5,-2 0,-1.5
CAP_ELEC_SIZE_G [mm] "Capacitor, polarized, aluminum can; 10.0x10.2mm DxH"
  round 0.635 on Mech15: 0(0,0)
  rrect25% 2x4.1 smd: 1(0,-4.35) 2(0,4.35)
  silkscreen extent -5.4,-5.4 5.4,5.3, body extent -5.25,-6 5.25,6, height 10.5
CAPC2012X135N [mm] "Chip Capacitor, Body 2.0x1.2mm, EIA 0805, IPC Medium Density"
  round 0.254 on Mech15: 0(0,0)
  rrect25% 1x1.4 smd: 1(-0.9,0) 2(0.9,0)
  Top Layer pour cut-out: -0.675,0.7 -0.475,0.9 0.475,0.9 0.675,0.7 0.675,-0.7 0.475,-0.9 -0.475,-0.9 -0.675,-0.7
  silkscreen extent -0.15,-0.65 0.15,0.65, body extent -1.1,-0.72 1.1,0.73, height 1.34
CAPE10.0MM_Rad_10x14mm [mm] "10mm Pitch Radial Capacitor 10x14mm DxH"
  round 0.5 on Mech15: 0(0,0)
  rrect25% 2x2 hole 0.965: 1(-2.5,0)
  round 2 hole 0.965: 2(2.5,0)
  silkscreen extent -7.37,-5 5,5, body extent -5.25,-5.24 5.21,5.24, height 13.99
DO-214AA [mm] "JEDEC DO214 variation AA. SMB"
  round 0.508 on Mech15: 0(0,0)
  rrect25% 2.5x2.2 smd: A(-2.4,0) K(2.4,0)
  silkscreen extent -2.54,-2.03 2.79,2.03, body extent -2.8,-1.97 2.8,1.98, height 2.62
FBC2012N [mm] "Ferrite Bead Chip, Body 2.0x1.2mm, 0805, IPC Medium Density"
  round 0.508 on Mech15: 0(0,0)
  rrect25% 0.8x1.35 smd: 1(-1.1,0) 2(1.1,0)
  silkscreen extent -0.43,-0.63 0.46,0.64, body extent -1,-0.62 1,0.63, height 0.9
FIDUCIAL [mm] "1mm fiducial with 3mm keepout"
  round 1 smd paste-1 mask+0.5: 0(0,0)
  Keep-Out Layer region: 0,-1.5 -0.574,-1.386 -1.061,-1.061 -1.386,-0.574 -1.5,0 -1.5,0 -1.386,0.574 -1.061,1.061 -0.574,1.386 0,1.5 0,1.5 0.574,1.386 1.061,1.061 1.386,0.574 1.5,0 1.5,0 1.386,-0.574 1.061,-1.061 0.574,-1.386 0,-1.5
FSM4JH [mm] "SWITCH, SPNO, 0.05A"
  oct 2.1x2.1 hole 0.965: 1(-3.25,-2.25) 1(3.25,-2.25) 2(-3.25,2.25) 2(3.25,2.25)
  silkscreen extent -3.4,-3.56 3.4,3.56
HDR1X4 [mm] "Connector; Header; 4 Position"
  rect 1.5x1.5 hole 0.9: 1(0,0)
  round 1.5 hole 0.9: 2(2.54,0) 3(5.08,0) 4(7.62,0)
  silkscreen extent -1.27,-1.27 8.89,1.27
HDR1X5 [mm] "Connector; Header; 5 Position"
  rect 1.5x1.5 hole 0.9: 1(0,0)
  round 1.5 hole 0.9: 2(2.54,0) 3(5.08,0) 4(7.62,0) 5(10.16,0)
  silkscreen extent -1.27,-1.27 11.43,1.27
HDR2X20 [mm] "Connector; Header; 20x2 Position"
  rect 1.5x1.5 hole 0.9: 1(0,0)
  round 1.5 hole 0.9: 2(0,2.54) 3(2.54,0) 4(2.54,2.54) 5(5.08,0) 6(5.08,2.54) 7(7.62,0) 8(7.62,2.54) 9(10.16,0) 10(10.16,2.54) 11(12.7,0) 12(12.7,2.54) 13(15.24,0) 14(15.24,2.54) 15(17.78,0) 16(17.78,2.54) 17(20.32,0) 18(20.32,2.54) 19(22.86,0) 20(22.86,2.54) 21(25.4,0) 22(25.4,2.54) 23(27.94,0) 24(27.94,2.54) 25(30.48,0) 26(30.48,2.54) 27(33.02,0) 28(33.02,2.54) 29(35.56,0) 30(35.56,2.54) 31(38.1,0) 32(38.1,2.54) 33(40.64,0) 34(40.64,2.54) 35(43.18,0) 36(43.18,2.54) 37(45.72,0) 38(45.72,2.54) 39(48.26,0) 40(48.26,2.54)
  silkscreen extent -1.27,-1.27 49.53,3.81
"Inductor 12x12mm" [mm]
  rect 3.1x5.5 smd: 1(-4.925,0) 2(4.925,0)
  silkscreen extent -6,-6 6,6
"M3 Spade Hole" [mm]
  round 7.5 hole 3.4: 1(0,0)
MC000051 [mm] "TERMINAL BLOCK, WIRE TO BRD, 3POS, 10AWG"
  round 2 hole 1.6: 1(0,0) 2(6.35,0) 3(12.7,0)
  silkscreen extent -3.15,-7.9 15.85,4.7
MC000232 [mm] "TERMINAL BLOCK, WIRE TO BRD, 2POS, 6AWG"
  round 2.4 hole 2: 1(-5.08,-5.08) 1(-5.08,5.08) 2(5.08,-5.08) 2(5.08,5.08)
  silkscreen extent -10.5,-6.7 10.5,11.8
MH_M4 [mm] "Plated and viad M4 mounting hole"
  round 9.5 hole 4.5: 1(0,0)
PIN1 [mm] "Connector; Plug"
  rect 1.5x1.5 hole 0.9: 1(0,0)
  silkscreen extent -1.4,-1.4 1.4,2.17
RESC1608X06L#1 [mm] "Chip Resistor, 2-Leads, Body 1.60x0.80mm, IPC High Density"
  rect 0.65x0.8 smd: 1(-0.625,0) 2(0.625,0)
  body extent -0.85,-0.45 0.85,0.45, height 0.6
RESC1608X06L#2 [mm] "Chip Resistor, 2-Leads, Body 1.60x0.80mm, IPC High Density"
  rect 0.65x0.8 smd: 1(0.625,0) 2(-0.625,0)
  body extent -0.85,-0.45 0.85,0.45, height 0.6
RESC1608X55N#1 [mm] "Chip Resistor, Body 1.6x0.8mm, EIA 0603, IPC Medium Density"
  round 0.254 on Mech15: 0(0,0)
  rrect25% 0.9x1 smd: 1(-0.85,0) 2(0.85,0)
  Top Layer pour cut-out: -0.6,0.5 -0.4,0.7 0.4,0.7 0.6,0.5 0.6,-0.5 0.4,-0.7 -0.4,-0.7 -0.6,-0.5
  silkscreen extent -0.15,-0.41 0.15,0.41, body extent -0.87,-0.47 0.88,0.48, height 0.54
RESC1608X55N#2 [mm] "Chip Resistor, Body 1.6x0.8mm, EIA 0603, IPC Medium Density"
  round 0.254 on Mech15: 0(0,0)
  rrect25% 0.9x1 smd: 1(0.85,0) 2(-0.85,0)
  Top Layer pour cut-out: 0.6,-0.5 0.4,-0.7 -0.4,-0.7 -0.6,-0.5 -0.6,0.5 -0.4,0.7 0.4,0.7 0.6,0.5
  silkscreen extent -0.15,-0.41 0.15,0.41, body extent -0.88,-0.48 0.87,0.47, height 0.54
RESC6332X70N [mm] "Chip Resistor, Body 6.3x3.2mm, 2512, IPC Medium Density"
  round 1 on Mech15: 0(0,0)
  rrect25% 1.25x3.35 smd: 1(-3,0) 2(3,0)
  silkscreen extent -2,-1.58 2,1.58, body extent -3.3,-1.7 3.3,1.7, height 0.69
SO8_N [mm] "SOIC, 8-Leads, Body 4.9x3.9mm, Pitch 1.27mm, IPC Medium Density"
  oval 2.2x0.6 smd: 1(-2.4,1.905) 2(-2.4,0.635) 3(-2.4,-0.635) 4(-2.4,-1.905) 5(2.4,-1.905) 6(2.4,-0.635) 7(2.4,0.635) 8(2.4,1.905)
  silkscreen extent -2.52,-2.5 0.9,2.88, body extent -2,-2.5 2,2.5, height 1.75
SO8FL [mm] "DFN5 5x6, 1.27P  (SO-8FL)  CASE 488AA"
  rect 0.9x0.6 on Bottom Paste: 7(0,-0.55) 7(0,0.3) 7(0,1.15) 7(0,2) 9(-1.15,-0.55) 9(-1.15,0.3) 9(-1.15,1.15) 9(-1.15,2) 10(1.15,-0.55) 10(1.15,0.3) 10(1.15,1.15) 10(1.15,2)
  rect 0.6x0.9 on Bottom Paste: 11(-1.875,3) 11(-0.65,3) 11(0.65,3) 11(1.875,3)
  rect 4.2x2.2 smd paste-10 mask+0.075: D(0,0) D(0,1.35)
  rect 4.7x1.5 smd paste-10 mask+0.075: D(0,2.75)
  rect 0.7x1.15 smd paste-0.05 mask+0.075: G(1.905,-2.725) S(-1.905,-2.725) S(-0.635,-2.725) S(0.635,-2.725)
  body extent -2.57,-2.95 2.58,3.2, height 1.13
SOD523F [mm] "SOD-523F; 2 Leads; Body 1.3 x 0.9 mm, (LxW)"
  round 0.508 on Mech15: 0(0,0)
  rrect20% 0.65x0.5 smd: A(0.9,0) K(-0.9,0)
  Top Layer pour cut-out: -0.725,-0.25 -0.725,0.25 -0.525,0.45 0.525,0.45 0.725,0.25 0.725,-0.25 0.525,-0.45 -0.525,-0.45
  silkscreen extent -0.25,-0.51 0.45,0.51, body extent -0.85,-0.45 0.85,0.45, height 0.7
SON80P400X80_HS-9N [mm] "SON, 8-Leads, Body 4.00x4.00mm, Pitch 0.80mm, Thermal Pad 3.00x2.49mm, IPC Medium Density"
  rect 0.9x0.3 smd mask+0: 1(-1.895,1.2) 2(-1.895,0.4) 3(-1.895,-0.4) 4(-1.895,-1.2) 5(1.895,-1.2) 6(1.895,-0.4) 7(1.895,0.4) 8(1.895,1.2)
  rect 2.49x3 smd paste-1.245 mask+0: 9(0,0)
  silkscreen extent -2.65,-2.2 2.2,2.25, body extent -2.05,-2.05 2.05,2.05, height 0.8
SOT23-5 [mm]
  round 0.5 on Mech15: 0(0,0)
  rrect25% 1x0.6 smd: 1(-1.3,0.95) 2(-1.3,0) 3(-1.3,-0.95) 4(1.3,-0.95) 5(1.3,0.95)
  silkscreen extent -0.51,-1.35 0.51,1.35, body extent -1.4,-1.45 1.4,1.45, height 1.44
SOT223 [mm] "SOT223 /SC-73"
  round 1 on Mech15: 0(0,0)
  rrect25% 1.75x1.1 smd: 1(-3.3,2.3) 2(-3.3,0) 3(-3.3,-2.3)
  rrect25% 1.75x3.5 smd: 4(3.3,0)
  silkscreen extent -1.85,-3.35 1.85,3.35, body extent -3.65,-3.35 3.65,3.35, height 1.8
"SPXO SG-210STF" [mm] "SPXO SG-210STF"
  rect 1.1x0.9 smd: 1(-0.85,-0.65) 2(0.85,-0.65) 3(0.85,0.65) 4(-0.85,0.65)
  silkscreen extent -1.8,-1.5 1.8,1.5
SQFP50P2200X2200X165_HS-145N [mm] "SQFP, 144-Leads, Body 20.00x20.00mm, Pitch 0.50mm, Thermal Pad 5.15x5.15mm, IPC Medium Density"
  oval 1.4x0.3 smd: 1(-10.7,8.75) 2(-10.7,8.25) 3(-10.7,7.75) 4(-10.7,7.25) 5(-10.7,6.75) 6(-10.7,6.25) 7(-10.7,5.75) 8(-10.7,5.25) 9(-10.7,4.75) 10(-10.7,4.25) 11(-10.7,3.75) 12(-10.7,3.25) 13(-10.7,2.75) 14(-10.7,2.25) 15(-10.7,1.75) 16(-10.7,1.25) 17(-10.7,0.75) 18(-10.7,0.25) 19(-10.7,-0.25) 20(-10.7,-0.75) 21(-10.7,-1.25) 22(-10.7,-1.75) 23(-10.7,-2.25) 24(-10.7,-2.75) 25(-10.7,-3.25) 26(-10.7,-3.75) 27(-10.7,-4.25) 28(-10.7,-4.75) 29(-10.7,-5.25) 30(-10.7,-5.75) 31(-10.7,-6.25) 32(-10.7,-6.75) 33(-10.7,-7.25) 34(-10.7,-7.75) 35(-10.7,-8.25) 36(-10.7,-8.75) 73(10.7,-8.75) 74(10.7,-8.25) 75(10.7,-7.75) 76(10.7,-7.25) 77(10.7,-6.75) 78(10.7,-6.25) 79(10.7,-5.75) 80(10.7,-5.25) 81(10.7,-4.75) 82(10.7,-4.25) 83(10.7,-3.75) 84(10.7,-3.25) 85(10.7,-2.75) 86(10.7,-2.25) 87(10.7,-1.75) 88(10.7,-1.25) 89(10.7,-0.75) 90(10.7,-0.25) 91(10.7,0.25) 92(10.7,0.75) 93(10.7,1.25) 94(10.7,1.75) 95(10.7,2.25) 96(10.7,2.75) 97(10.7,3.25) 98(10.7,3.75) 99(10.7,4.25) 100(10.7,4.75) 101(10.7,5.25) 102(10.7,5.75) 103(10.7,6.25) 104(10.7,6.75) 105(10.7,7.25) 106(10.7,7.75) 107(10.7,8.25) 108(10.7,8.75)
  oval 0.3x1.4 smd: 37(-8.75,-10.7) 38(-8.25,-10.7) 39(-7.75,-10.7) 40(-7.25,-10.7) 41(-6.75,-10.7) 42(-6.25,-10.7) 43(-5.75,-10.7) 44(-5.25,-10.7) 45(-4.75,-10.7) 46(-4.25,-10.7) 47(-3.75,-10.7) 48(-3.25,-10.7) 49(-2.75,-10.7) 50(-2.25,-10.7) 51(-1.75,-10.7) 52(-1.25,-10.7) 53(-0.75,-10.7) 54(-0.25,-10.7) 55(0.25,-10.7) 56(0.75,-10.7) 57(1.25,-10.7) 58(1.75,-10.7) 59(2.25,-10.7) 60(2.75,-10.7) 61(3.25,-10.7) 62(3.75,-10.7) 63(4.25,-10.7) 64(4.75,-10.7) 65(5.25,-10.7) 66(5.75,-10.7) 67(6.25,-10.7) 68(6.75,-10.7) 69(7.25,-10.7) 70(7.75,-10.7) 71(8.25,-10.7) 72(8.75,-10.7) 109(8.75,10.7) 110(8.25,10.7) 111(7.75,10.7) 112(7.25,10.7) 113(6.75,10.7) 114(6.25,10.7) 115(5.75,10.7) 116(5.25,10.7) 117(4.75,10.7) 118(4.25,10.7) 119(3.75,10.7) 120(3.25,10.7) 121(2.75,10.7) 122(2.25,10.7) 123(1.75,10.7) 124(1.25,10.7) 125(0.75,10.7) 126(0.25,10.7) 127(-0.25,10.7) 128(-0.75,10.7) 129(-1.25,10.7) 130(-1.75,10.7) 131(-2.25,10.7) 132(-2.75,10.7) 133(-3.25,10.7) 134(-3.75,10.7) 135(-4.25,10.7) 136(-4.75,10.7) 137(-5.25,10.7) 138(-5.75,10.7) 139(-6.25,10.7) 140(-6.75,10.7) 141(-7.25,10.7) 142(-7.75,10.7) 143(-8.25,10.7) 144(-8.75,10.7)
  rect 5.15x5.15 smd: 145(0,0)
  silkscreen extent -10.82,-9.6 9.6,9.6, body extent -10,-10 10,10, height 1.65
StarpointWide [mm] "Wide star point meant for connecting ground planes"
  round 1 smd paste-1.5 mask-1.5: 1(0,0) 2(0,0)
TSOP65P210X110-6N [mm] "TSOP, 6-Leads, Body 2.00x1.25mm, Pitch 0.65mm, IPC Medium Density"
  oval 0.85x0.4 smd: 1(-1.125,0.65) 2(-1.125,0) 3(-1.125,-0.65) 4(1.125,-0.65) 5(1.125,0) 6(1.125,0.65)
  silkscreen extent -1.25,-1.1 0.3,1.53, body extent -0.7,-1.1 0.7,1.1, height 1.1

## Part data
1C1 1C2 1C3 2C1 2C2 2C3 3C1 3C2 3C3: "CAP, ALU ELEC, 680UF, 35V, RAD"
1C4 1C5 1C6 1C7 1C8 1C9 2C4 2C5 2C6 2C7 2C8 2C9 3C4 3C5 3C6 3C7 3C8 3C9 C16 C26 C36 C37 C38 C39 C40 C41 C42 C43 C45 C46 C65: "CAP, MLCC, X5R, 1UF, 16V, 0603"
1C10 1C11 2C10 2C11 3C10 3C11 C27 C28 C29 C30 C31 C32 C33 C34 C35 C47 C48 C49 C50 C51 C52 C56 C57 C58 C59 C60 C61 C62 C63: "CAP, MLCC, X7R, 100NF, 16V, 0603"
1D1 1D2 1D3 2D1 2D2 2D3 3D1 3D2 3D3: "DIODE, SCHOTTKY, 200MA, 30V"
1J1 2J1 3J1: "Header, 5-Pin"
1J2 1J3 1J4 2J2 2J3 2J4 3J2 3J3 3J4 J6 J7: library part "M3 Spade Terminal", "M3 Spade Terminal"
1J5 2J5 3J5: "TERMINAL BLOCK, WIRE TO BRD, 3POS, 10AWG"
1LED1 2LED1 3LED1 LED2: library part ASMB-MTB1-0A3A2, "LED, HB, RGB, 0.09W, PLCC-4"
1Q1 1Q2 1Q3 1Q4 1Q5 1Q6 1Q7 1Q8 1Q9 1Q10 1Q11 1Q12 2Q1 2Q2 2Q3 2Q4 2Q5 2Q6 2Q7 2Q8 2Q9 2Q10 2Q11 2Q12 3Q1 3Q2 3Q3 3Q4 3Q5 3Q6 3Q7 3Q8 3Q9 3Q10 3Q11 3Q12: "MOSFET, N CH, 30V, 70A, SO-8 FL"
1R1 1R2 1R3 1R4 1R5 1R6 2R1 2R2 2R3 2R4 2R5 2R6 3R1 3R2 3R3 3R4 3R5 3R6 R49: "RESISTOR, 0603, 3K, 1%, ANTI SULFUR"
1R7 1R8 1R9 1R12 1R13 1R14 2R7 2R8 2R9 2R12 2R13 2R14 3R7 3R8 3R9 3R12 3R13 3R14 R25: "RES, THICK FILM, 1OHM, 1%, 0.1W"
1R10 1R11 2R10 2R11 3R10 3R11: "RESISTOR, R0005, 2.0W, 1%"
1R15 1R16 1R17 2R15 2R16 2R17 3R15 3R16 3R17 R28 R29 R30 R31 R32 R33 R34 R35 R36 R37 R38 R39: "RES, THICK FILM, 330 OHM, 1%, 0.1W"
1U1 1U2 1U3 2U1 2U2 2U3 3U1 3U2 3U3: "DRIVER, MOSFET, HALF BRIDGE, WSON-8, 1A"
1U4 1U5 2U4 2U5 3U4 3U5: "CURRENT SENSE AMP, 50V/V, 80KHZ"
C17 C18 C19 C20 C21 C22 C23 C24 C25: "CAP, MLCC, C0G/NP0, 220PF, 50V, 0603"
C44: "CAP, MLCC, X7R, 470PF, 50V, 0603"
C53: "CAP, ALU ELEC, 470UF, 16V, SMD"
C54 C55 C64: "CAP, MLCC, Y5V, 10UF, 0805"
D5: "DIODE, SCHOTTK, RECTIF, 1A, 30V, SMB"
FID1 FID2 FID3 FID4 FID5 FID6 FID7: "1mm Fiducial with 2mm soldermask, 3mm keepout"
J8: "TERMINAL BLOCK, WIRE TO BRD, 2POS, 6AWG"
J13: "Header, 20-Pin, Dual row"
J14: library part CONN_HEADER_2x5P_0.100in_Male, "Header THD 10 POS Double-row 2.54mm pitch"
J15 J16 J17: "Header, 4-Pin"
L1: "INDUCTOR, 220µH, 20%, 2PINS"
L2: "FERRITE BEAD, 0.1OHM, 2A, 0805"
MH1 MH2 MH3 MH4 MH5: library part MH_M4, "M4 Mounting Hole"
R18 R26 R40 R41 R42 R45 R46 R51 R52: "Resistor, 10k, 0603"
R19 R27 R43 R44 R47 R50: "RESISTOR, CERAMIC, 1K, 0.1W, 1%"
R48: "RESISTOR, 0603, 0.1W, 1%, 0R33"
SP1: library part GroundStarPoint, "Wide star point meant for joining ground planes"
SW1 SW2: "SWITCH, SPNO, 0.05A"
U9: "DC-DC CONV, BOOST/BUCK/INVERTING, SOIC-8"
U10: "IC, LDO, REG, 3.3V, SOT223"
U11: "LDO, FIXED, 12V, 0.1A, SOT-23-5"